# Altium PCB PCB1.PcbDoc
Units mm, origin at the board's own origin, x right, y up, seen from the top; angles counter-clockwise.
Board outline 99.31 x 99.82 mm, 2 copper layers (trên, dưới); 24 components, 29 nets, 133 pads, 4 vias.
Unrouted connection lines stored in the file: 25.
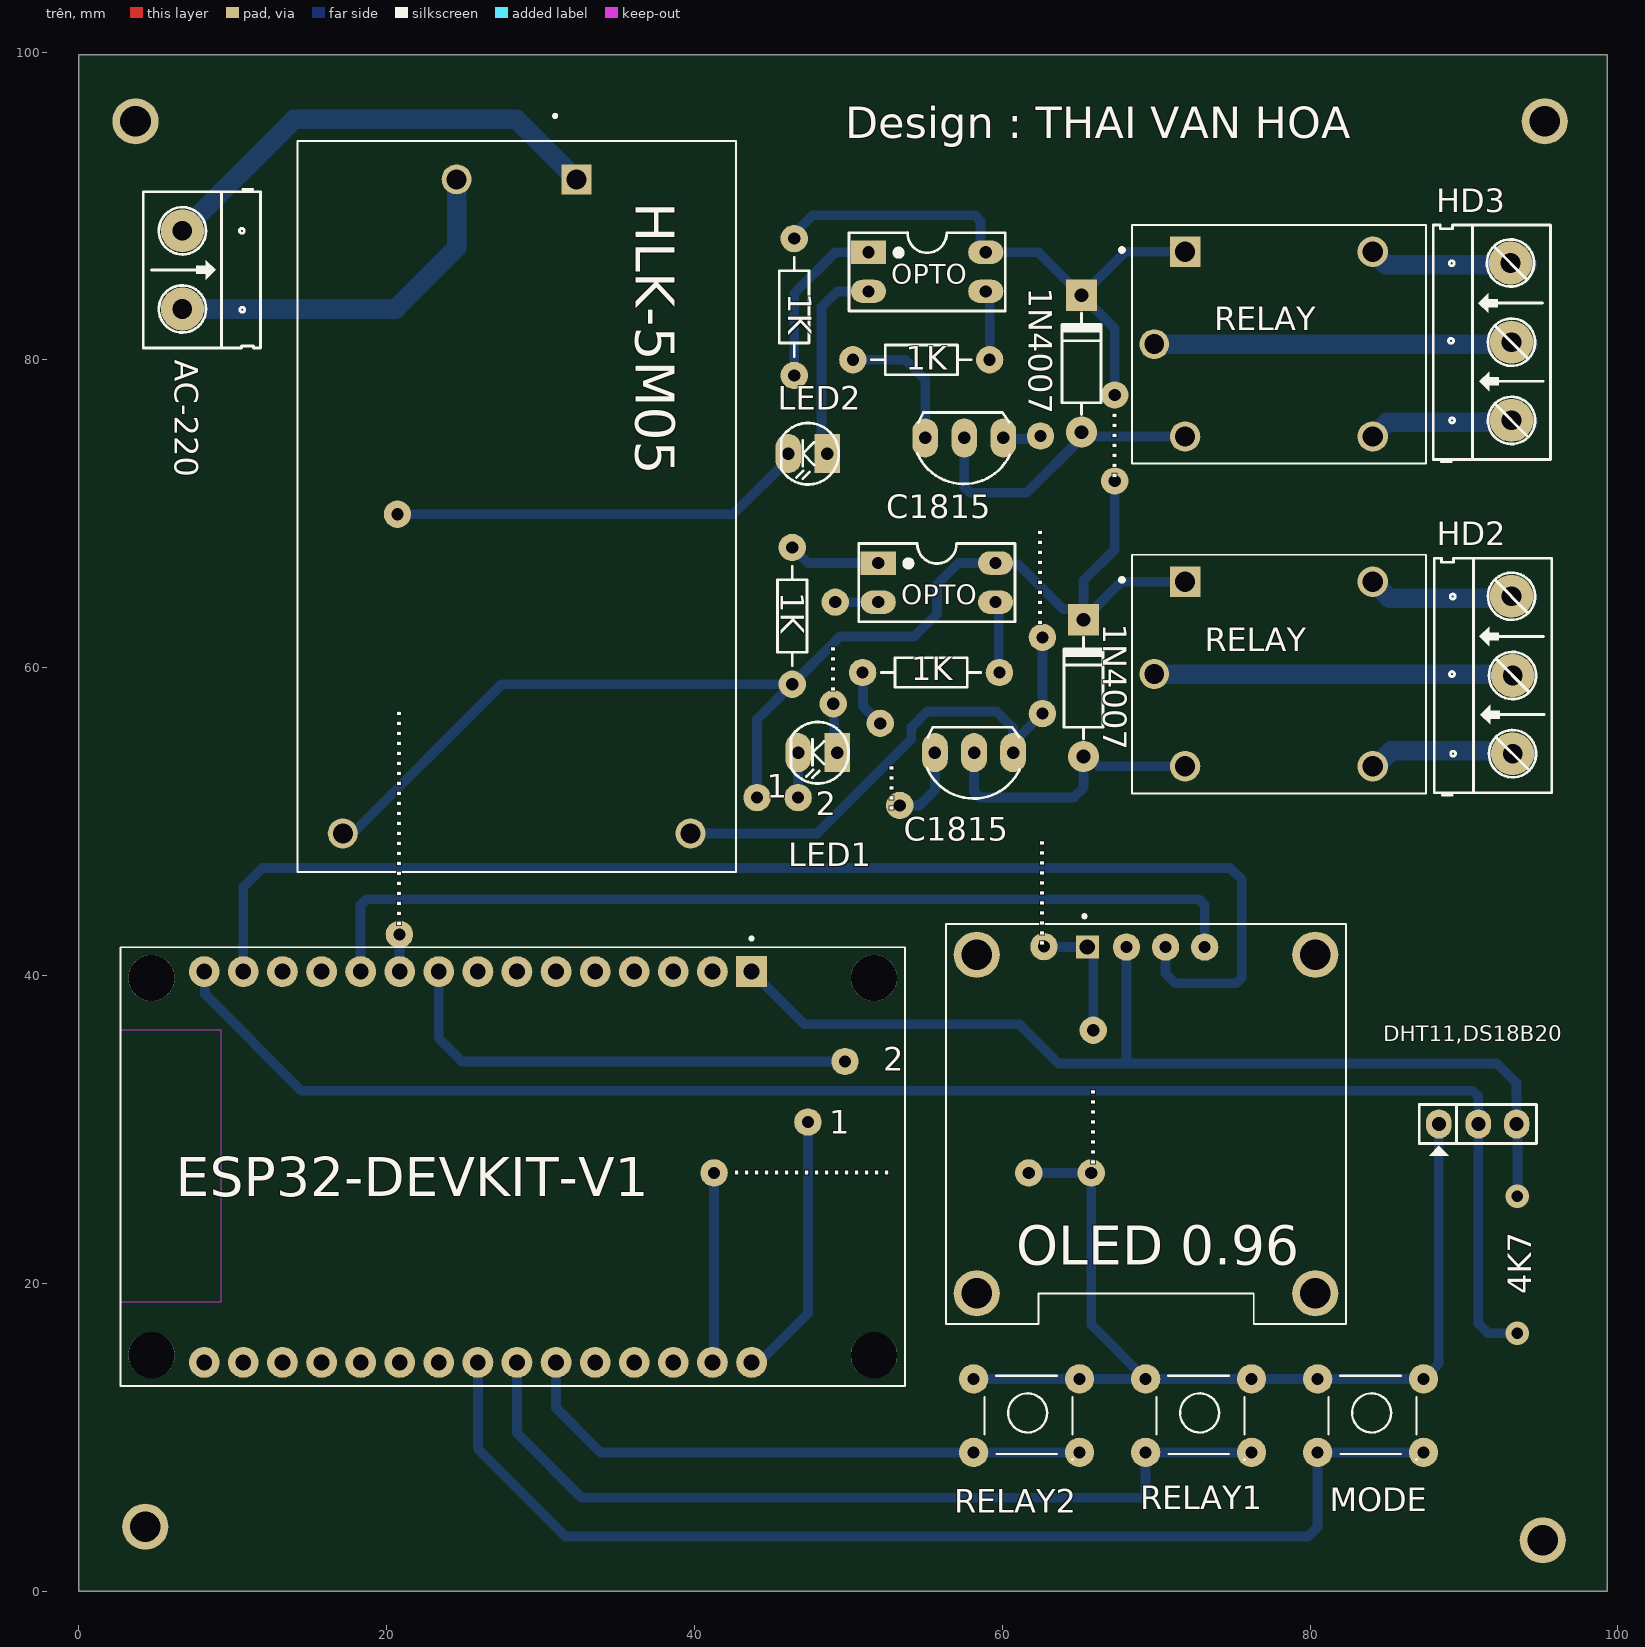
[diagram p0: trên view]
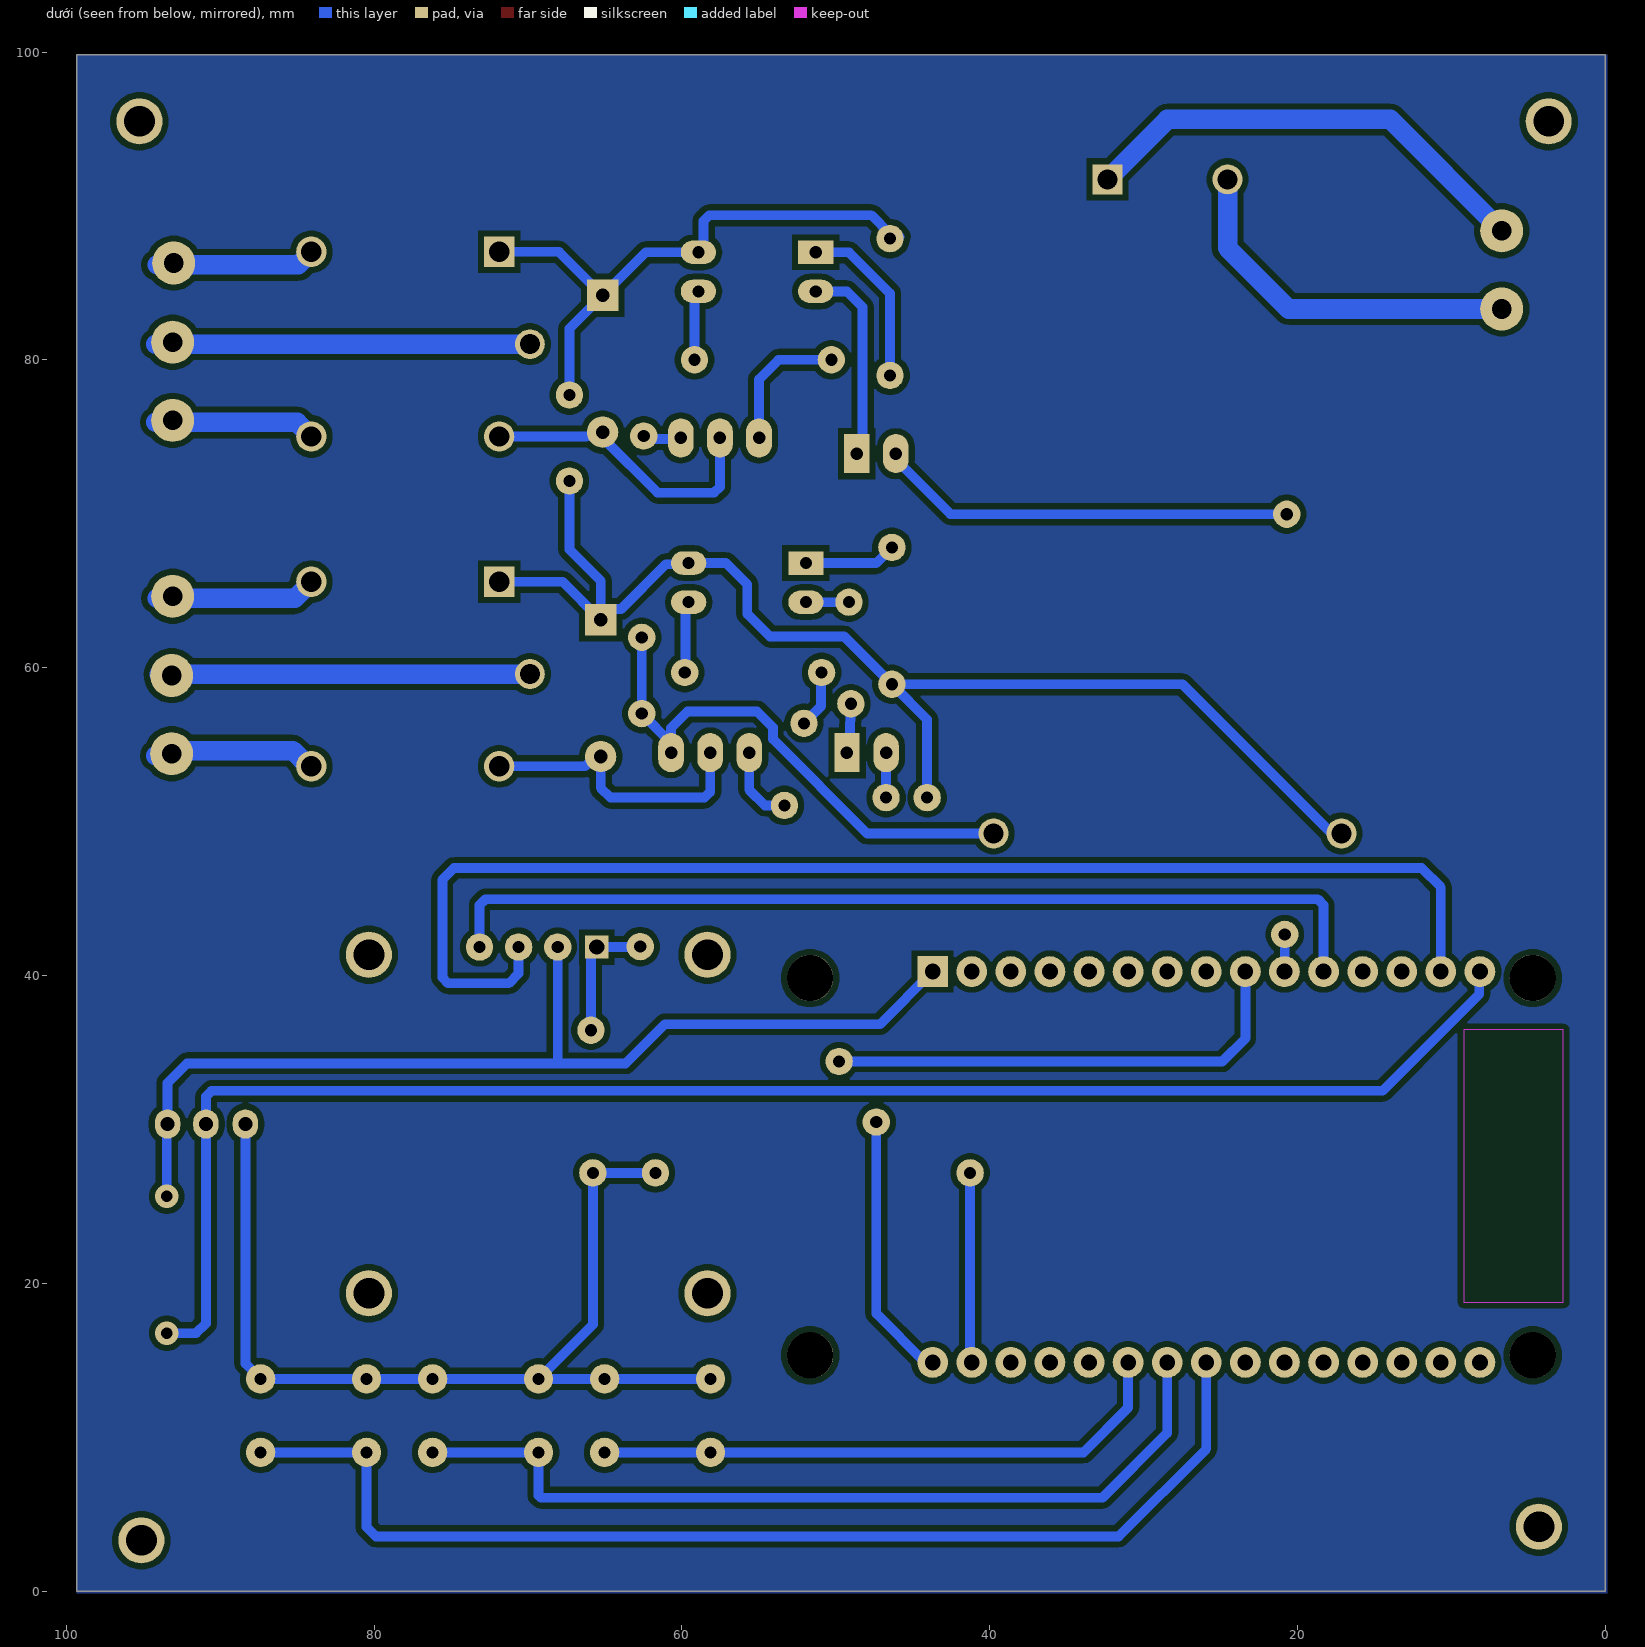
[diagram p1: dưới view, seen from below]
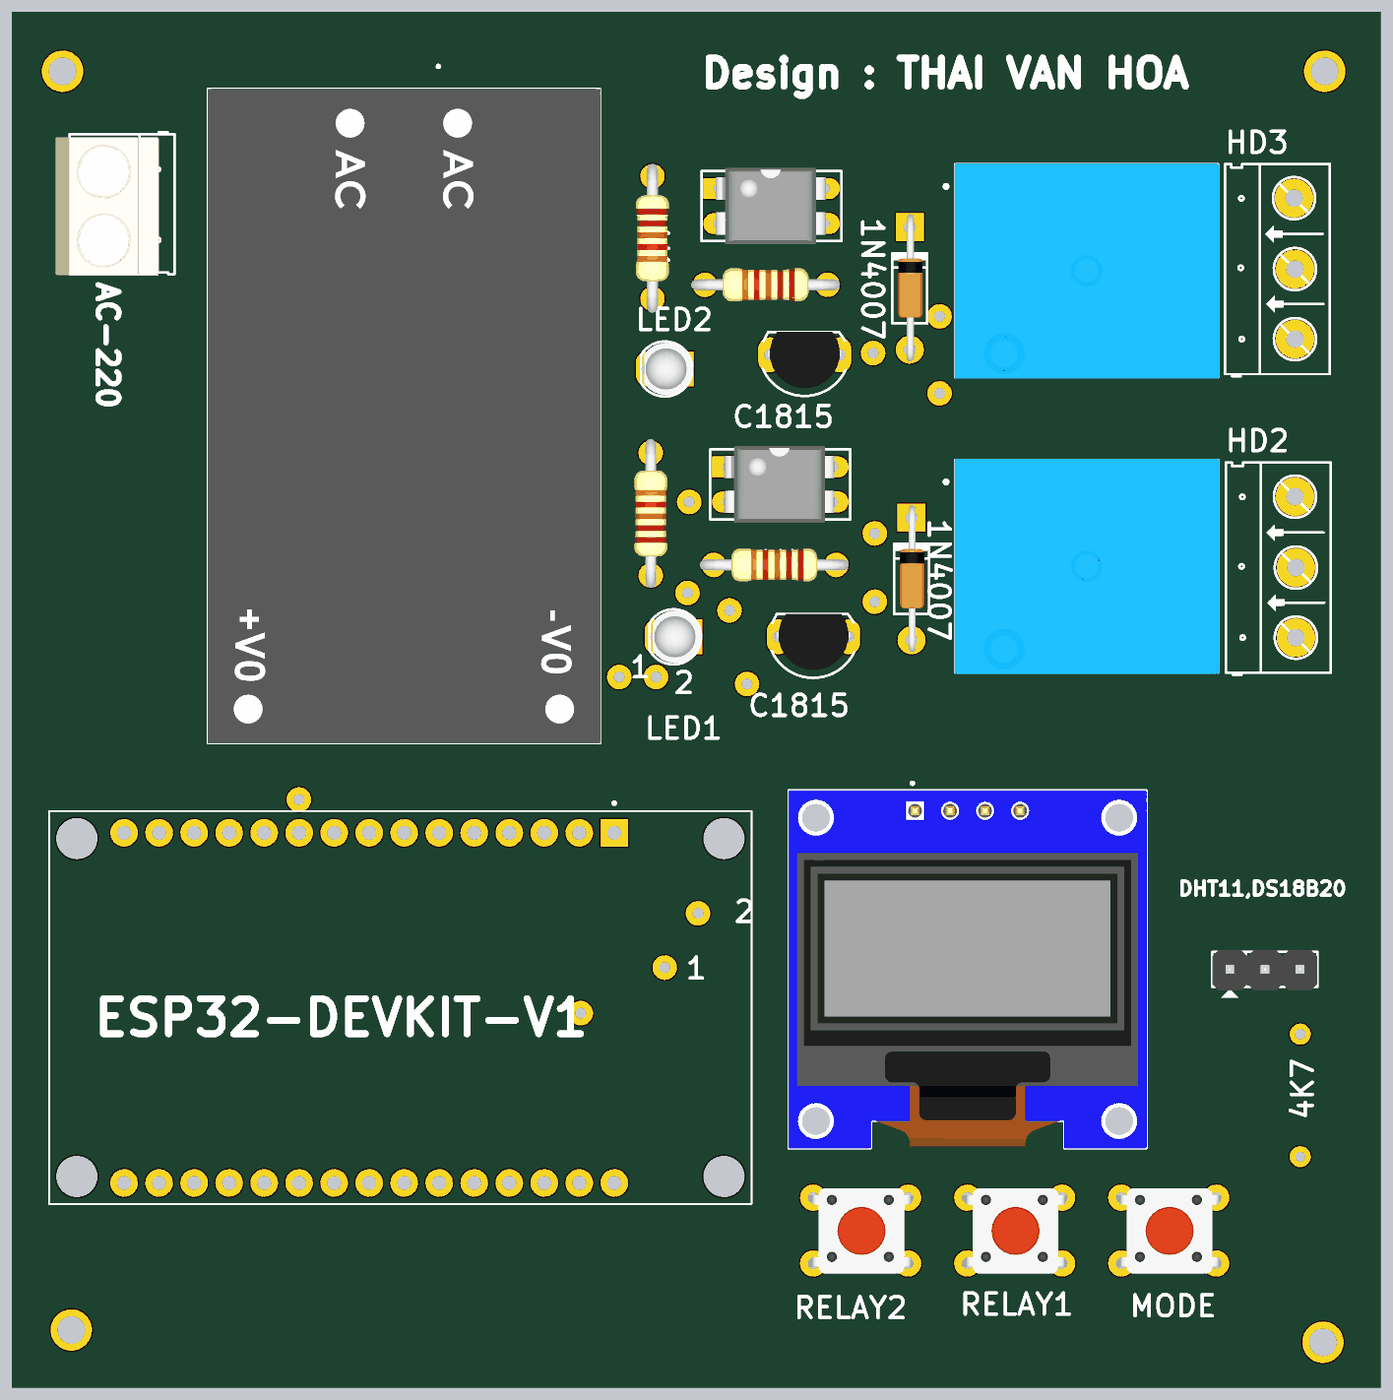
[diagram p2: 3D render of the assembled board from above, using the file's embedded part models]

## Layer stack, top to bottom
Top Solder: solder mask 0.0102, Solder Resist, Dk 3.5
trên: signal copper 0.0356
Dielectric 1: dielectric 0.32, FR-4, Dk 4.8
dưới: signal copper 0.0356
Bottom Solder: solder mask 0.0102, Solder Resist, Dk 3.5

## Board outline
0,0 99.314,0 99.314,99.822 0,99.822

## Design rules (kind name [scope] priority, off if disabled: settings)
Clearance [All] p1: gap=0.381 ignorepadtopadclearanceinfootprint=FALSE
PolygonConnect [All] p1: connectstyle=Relief reliefconductorwidth=0.254 reliefentries=4 polygonreliefangle="90 Angle" airgapwidth=0.254
RoutingVias [All] p1: holewidth=0.711 width=1.27 viastyle="Through Hole" minholewidth=0.711 minwidth=1.27 maxholewidth=0.711 maxwidth=1.27
SolderMaskExpansion [All] p1: expansion=0.102 istentingtop=FALSE
Width [All] p1: maxlimit=1.27 minlimit=0.381 preferedwidth=0.635 checkconnectedcopper=TRUE
30 further rules are at their usual default settings.

## Classes and differential pairs
component class Sheet2: 1K 1N4007 AC-220 C1815 DHT11,DS18B20 ESP32-DEVKIT-V1 HD2 HD3 Hi-Link LED1 LED2 MODE OPTO RELAY RELAY1

## Components (designator, comment, footprint, x,y, rotation, side; value= is the part's Value field where it differs from the comment)
1K "Res1" R1/4W 50.292,80.01 r0 top value=1K (schematic designator R4)
1K "Res1" R1/4W 46.482,78.994 r90 top value=1K (schematic designator R3)
1K "Res1" R1/4W 50.927,59.69 r0 top value=1K (schematic designator R2)
1K "Res1" R1/4W 46.355,67.818 r270 top value=1K (schematic designator R1)
1N4007 "1N4007" D1A 65.151,75.311 r270 top (schematic designator D2)
1N4007 "1N4007" D1A 65.278,54.229 r270 top (schematic designator D1)
AC-220 "Header 2" HED2 6.731,88.392 r270 top (schematic designator HD1)
C1815 "C1815" QTO-92 57.531,74.93 r180 top (schematic designator Q2)
C1815 "C1815" QTO-92 58.166,54.483 r180 top (schematic designator Q1)
DHT11,DS18B20 "Jumper 3" JP3 90.907,30.353 r0 top value=J3 (schematic designator J1)
ESP32-DEVKIT-V1 "ESP32-DEVKIT-V1" MODULE_ESP32_DEVKIT_V1 28.194,27.559 r270 top (schematic designator U2)
HD2 "Header 3" HED3 93.158,54.416 r90 top
HD3 "Header 3" HED3 93.091,76.073 r90 top
HLK-5M05 "HLK-10M05" CONV_HLK-10M05 28.448,70.485 r270 top (schematic designator PS1)
LED1 "LED" LED-3 49.276,54.483 r180 top value="LED 3 ly Single Colour"
LED2 "LED" LED-3 48.641,73.914 r180 top value="LED 3 ly Single Colour"
MODE "BT" SW4 80.823,13.995 r0 top (schematic designator BT1)
"OLED 0.96" "DM-OLED096-636" MODULE_DM-OLED096-636 69.342,30.353 r0 top (schematic designator U1)
OPTO "OPTO PC817" DIP4/W0.3 51.308,86.995 r270 top value=PC817 (schematic designator OPTO2)
OPTO "OPTO PC817" DIP4/W0.3 51.943,66.802 r270 top value=PC817 (schematic designator OPTO1)
RELAY "SRD-05VDC-SL-C" RELAY_SRD-05VDC-SL-C 77.978,81.026 r0 top (schematic designator K2)
RELAY "SRD-05VDC-SL-C" RELAY_SRD-05VDC-SL-C 77.978,59.594 r0 top (schematic designator K1)
RELAY1 "BT" SW4 69.647,13.995 r0 top (schematic designator BT2)
RELAY2 "BT" SW4 58.471,13.995 r0 top (schematic designator BT3)

## Footprints (in the part's own frame and the unit in brackets; to place one, negate y for a bottom-side part, rotate by r counter-clockwise, add the part's x,y. Pads: shape width x height; smd on the part's side, far side on the other; paste and mask are expansions set on the pad)
CONV_HLK-10M05 [mm]
  rect 1.95x1.95 / inner round 1.95 / far side rect 1.95x1.95 hole 1.3: 1(-21.25,3.9)
  round 1.95 hole 1.3: 2(-21.25,-3.9) 3(21.25,11.3) 4(21.25,-11.3)
  silkscreen extent -25.47,-14.25 23.75,14.25, body extent -23.75,-14.25 23.75,14.25, height 22
D1A [mil] "Diode 1A, W 100mil, L 350mil"
  round 80 hole 35: 1(0,0)
  rect 80x80 hole 35: 2(-350,0)
  silkscreen extent -305,-50 -45,50, body extent -386,-33 34,36, height 84
DIP4/W0.3 [mil] "4 PIN, W 300mil, Pin to pin 100mil"
  rect 60x90 hole 31: 1(0,0)
  oval 60x90 hole 31: 2(100,0) 3(100,300) 4(0,300)
  silkscreen extent -50,-50 150,350, body extent -59,-10 159,305, height 170
HED2 [mil] "Header 2, 2 pin, hight 300mil, Pin to Pin 200, Colour Green"
  round 110 hole 50: 1(0,0) 2(200,0)
  silkscreen extent -106,-100 300,200, body extent -92,-140 302,155, height 394
HED3 [mil] "Header 3, 3 pin, hight 300mil, Pin to Pin 200, Colour Green"
  round 110 hole 50: 1(0,0) 2(200,0) 3(402.62,2.62)
  silkscreen extent -106,-100 500,200
JP3 [mil] "Jumper 3"
  oval 65x75 hole 36: 1(-100,0) 2(1,0) 3(99,0)
  silkscreen extent -150,-81 150,50, body extent -150,-60 150,55, height 355
LED-3 [mil] "LED 2 PIN, 3ly Only colour"
  rect 65x100 hole 32: 1(0,0)
  oval 65x100 hole 32: 2(100,0)
  silkscreen extent -29,-78 118,79, body extent -29,-75 109,75, height 256
MODULE_DM-OLED096-636 [mm]
  rect 1.508x1.508 / inner round 1.508 / far side rect 1.508x1.508 hole 1: 1(-3.81,11.5)
  round 1.778 hole 0.787: 2(-1.27,11.5) 3(1.27,11.5) 4(3.81,11.5)
  round 3 hole 2: S1(-11,11) S2(11,11) S3(11,-11) S4(-11,-11)
  silkscreen extent -13,-13 13,13.6, body extent -13,-13 13,13, height 5.66
MODULE_ESP32_DEVKIT_V1 [mm]
  rect 2x2 / inner round 2 / far side rect 2x2 hole 1.02: 1(-12.7,15.515)
  round 2 hole 1.02: 2(-12.7,12.975) 3(-12.7,10.435) 4(-12.7,7.895) 5(-12.7,5.355) 6(-12.7,2.815) 7(-12.7,0.275) 8(-12.7,-2.265) 9(-12.7,-4.805) 10(-12.7,-7.345) 11(-12.7,-9.885) 12(-12.7,-12.425) 13(-12.7,-14.965) 14(-12.7,-17.505) 15(-12.7,-20.045) 16(12.7,-20.045) 17(12.7,-17.505) 18(12.7,-14.965) 19(12.7,-12.425) 20(12.7,-9.885) 21(12.7,-7.345) 22(12.7,-4.805) 23(12.7,-2.265) 24(12.7,0.275) 25(12.7,2.815) 26(12.7,5.355) 27(12.7,7.895) 28(12.7,10.435) 29(12.7,12.975) 30(12.7,15.515)
  round 3 hole 3 unplated: ""(-12.28,23.475) ""(-12.28,-23.475) ""(12.23,23.475) ""(12.23,-23.475)
  Keep-Out Layer region: 8.78,-25.475 -8.91,-25.475 -8.91,-18.985 8.78,-18.985
  Keep-Out Layer region: 8.78,-25.475 -8.91,-25.475 -8.91,-18.985 8.78,-18.985
  silkscreen extent -14.95,-25.47 14.23,25.47
QTO-92 [mil] "TO-92"
  oval 66x100 hole 32: 1(-100,0) 2(0,0) 3(100,0)
  silkscreen extent -117,-65 120,118, body extent -109,-66 109,95, height 245
R1/4W [mil] "R 1/4W, 2 Pin, 350mil"
  round 70 hole 31: 1(0,0) 2(350,0)
  silkscreen extent 48,-38 302,38, body extent -40,-47 386,47, height 111
RELAY_SRD-05VDC-SL-C [mm]
  rect 1.98x1.98 / inner round 1.98 / far side rect 1.98x1.98 hole 1.32: A1(-6.1,6)
  round 1.98 hole 1.32: A2(-6.1,-6) NC(6.1,6) NO(6.1,-6)
  round 1.935 hole 1.29: COM(-8.1,0)
  silkscreen extent -10.3,-7.75 9.55,7.75, body extent -9.6,-7.8 9.6,7.8, height 15.8
SW4 [mil] "SW button 4pin, 250 x250 mil"
  round 75 hole 31: 1(-13,-8) 1(258,-8) 2(-13,-196) 2(258,-196)
  silkscreen extent 15,-215 240,0, body extent -31,-225 281,19, height 276

## Part data
1K 1K 1K 1K: library part Res1_4, "Resistor", Manufacturer="Generic Components", Class=Passive, Published=08/06/2000, Publisher="Altium Hobart Technology Centre", SubClass=Resistor
1N4007 1N4007: library part D1A, "Diode 1A"
AC-220: library part Hed2, "Header 2 (Green)"
C1815 C1815: "NPN 600mW, ECB"
DHT11,DS18B20: library part JP3
ESP32-DEVKIT-V1: "Dual core, Wi-Fi: 2.4 GHz up to 150 Mbits/s,BLE (Bluetooth Low Energy) and legacy Bluetooth, 32 bits, Up to 240 MHz", Package=None, Availability="Not in stock", Check_prices=https://www.snapeda.com/parts/ESP32-DEVKIT-V1/Do+it/view-part/?ref=eda, MF="Do it", MP=ESP32-DEVKIT-V1, Price=None, SnapEDA_Link=https://www.snapeda.com/parts/ESP32-DEVKIT-V1/Do+it/view-part/?ref=snap
HD2 HD3: "Header 3 (Green)"
HLK-5M05: "10W Ultra-Compact Power Module", Package=Package, Check_prices=https://www.snapeda.com/parts/HLK-10M05/Hi-link/view-part/?ref=eda, MF=Hi-link, MP=HLK-10M05, SnapEDA_Link=https://www.snapeda.com/parts/HLK-10M05/Hi-link/view-part/?ref=snap
LED1 LED2: "LED Single colour Green and Red"
MODE RELAY1 RELAY2: library part BUTTON
"OLED 0.96": "0.96â€ 128 X 64 MONOCHROME GRAPHIC OLED DISPLAY MODULE - I2C", Package=Package, Check_prices=https://www.snapeda.com/parts/DM-OLED096-636/Display+Module/view-part/?ref=eda, MF="Display Module", MP=DM-OLED096-636, SnapEDA_Link=https://www.snapeda.com/parts/DM-OLED096-636/Display+Module/view-part/?ref=snap
OPTO OPTO: "Single Opto"
RELAY RELAY: "5V Trigger Relay Module For Arduino And Raspberry Pi 5V Trigger Relay Module For Arduino And Raspberry Pi", Package="NON STANDARD-5 Songle Relay", Availability="Not in stock", Check_prices=https://www.snapeda.com/parts/SRD-05VDC-SL-C/Songle+Relay/view-part/?ref=eda, MF="Songle Relay", MP=SRD-05VDC-SL-C, Price=None, SnapEDA_Link=https://www.snapeda.com/parts/SRD-05VDC-SL-C/Songle+Relay/view-part/?ref=snap

## Free pads (board coordinates)
  round 3 hole 2: 7(3.683,95.504) 7(4.318,4.191) 7(95.123,3.302) 8(95.25,95.504)
  round 1.778 hole 0.787: 9(65.786,27.178) 10(65.913,36.449) 11(62.71,41.882) 12(62.611,61.976) 13(62.484,75.057) 14(62.611,57.023) 15(67.31,72.136) 16(67.31,77.724) 17(52.07,56.388) 18(53.34,51.054) 19(49.149,64.262) 20(49.022,57.658) 21(47.371,30.48) 22(44.069,51.562) 23(46.736,51.562) 24(49.784,34.417) 25(41.275,27.178) 26(61.722,27.178) 27(20.828,42.672) 28(20.701,69.977)

## Via types
v1: diameter 1.524, hole 0.762, trên to dưới, 2 vias
v2: diameter 1.27, hole 0.711, trên to dưới, 2 vias

## Nets (pads, with @x,y where several pads share a name; then routed paths per layer and width w, separated by ;. In a path a pad name is that pad's centre, name@x,y a point inside that pad or via, vN(x,y) a via of type N, cw(c..) or ccw(c..) an arc to the next point about the centre after c; other vN are vias at no path point)
3V3: "OLED 0.96.2" DHT11,DS18B20.3 ESP32-DEVKIT-V1.1 | length 62.7
  dưới w0.635: ESP32-DEVKIT-V1.1 47.138,36.83 61.124,36.83 63.664,34.29 92.151,34.29 93.421,33.02 93.421,30.353 ; 68.072,34.544 68.072,41.853
D18: ESP32-DEVKIT-V1.9 LED1.2
D19: ESP32-DEVKIT-V1.10 LED2.2 pad.27 | length 0.7
  trên w0.635: LED2.2@46.101,73.195 LED2.2
D21: "OLED 0.96.4" ESP32-DEVKIT-V1.11 | length 62.2
  dưới w0.635: ESP32-DEVKIT-V1.11 18.309,44.586 18.681,44.958 72.771,44.958 73.152,44.577 73.152,41.853
D22: "OLED 0.96.3" ESP32-DEVKIT-V1.14 | length 84.6
  dưới w0.635: ESP32-DEVKIT-V1.14 10.689,45.741 11.938,46.99 74.803,46.99 75.565,46.228 75.565,39.869 75.193,39.497 71.247,39.497 70.612,40.132 70.612,41.853
D23: DHT11,DS18B20.2 ESP32-DEVKIT-V1.15 | length 88.8
  dưới w0.635: ESP32-DEVKIT-V1.15 8.186,40.222 8.186,38.804 14.478,32.512 90.56,32.512 90.932,32.14 90.932,30.353
D25: ESP32-DEVKIT-V1.23 MODE.2
D26: ESP32-DEVKIT-V1.24 RELAY1.2
D27: ESP32-DEVKIT-V1.25 RELAY2.2
GND: "OLED 0.96.1" C1815.1 DHT11,DS18B20.1 ESP32-DEVKIT-V1.29 HLK-5M05.3 MODE.1 RELAY1.1 RELAY2.1 | length 27.3
  trên w0.635: C1815.1@60.071,74.78 C1815.1@60.071,74.93 ; C1815.1@60.706,54.483 C1815.1@60.706,54.916
  dưới w0.635: HLK-5M05.3 47.965,49.235 54.089,55.359 54.089,56.121 55.118,57.15 59.639,57.15 60.706,56.083 C1815.1@60.706,54.483
NetD1_1: 1N4007.1@65.278,54.229 C1815.2@58.166,54.483 RELAY.A2@71.878,53.594 | length 19
  dưới w0.635: C1815.2@58.166,54.483 58.166,51.934 58.538,51.562 64.643,51.562 65.278,52.197 65.278,54.229 65.656,54.229 66.291,53.594 RELAY.A2@71.878,53.594
NetD2_1: 1N4007.1@65.151,75.311 C1815.2@57.531,74.93 RELAY.A2@71.878,75.026 | length 19.3
  dưới w0.635: C1815.2@57.531,74.93 57.531,71.746 57.903,71.374 61.595,71.374 1N4007.1@65.164,74.943 ; 1N4007.1@65.151,75.311 65.436,75.026 65.454,75.044 66.204,75.044 66.221,75.026 RELAY.A2@71.878,75.026
NetHD1_1: AC-220.1 HLK-5M05.1 | length 30.2
  dưới w1.27: AC-220.1 13.97,95.631 28.452,95.631 HLK-5M05.1
NetHD1_2: AC-220.2 HLK-5M05.2 | length 23.9
  dưới w1.27: AC-220.2 20.574,83.312 24.548,87.286 HLK-5M05.2
NetHD2_1: HD2.1 RELAY.NO@84.078,53.594 | length 10.6
  dưới w1.27: RELAY.NO@84.078,53.594 84.27,53.594 85.286,54.61 93.441,54.61 93.761,54.289 HD2.1@94.174,54.289
NetHD2_2: HD2.2 RELAY.COM@69.878,59.594 | length 24.4
  dưới w0.635: RELAY.COM@69.878,59.594 RELAY.COM@69.886,59.586 ; HD2.2@93.957,59.586 HD2.2@94.174,59.369
  dưới w1.27: RELAY.COM@69.886,59.586 HD2.2@93.957,59.586
NetHD2_3: HD2.3 RELAY.NC@84.078,65.594 | length 10.5
  dưới w1.27: RELAY.NC@84.078,65.594 85.156,64.516 HD2.3@94.107,64.516
NetHD3_1: HD3.1 RELAY.NO@84.078,75.026 | length 10.5
  dưới w1.27: RELAY.NO@84.078,75.026 84.998,75.946 HD3.1@94.174,75.946
NetHD3_2: HD3.2 RELAY.COM@69.878,81.026 | length 24.3
  dưới w1.27: RELAY.COM@69.878,81.026 HD3.2@94.174,81.026
NetHD3_3: HD3.3 RELAY.NC@84.078,87.026 | length 10.4
  dưới w1.27: RELAY.NC@84.078,87.026 84.931,86.173 HD3.3@94.107,86.173
NetLED1_1: LED1.1 OPTO.2@51.943,64.262
NetLED2_1: LED2.1 OPTO.2@51.308,84.455 | length 13.2
  dưới w0.635: LED2.1 48.26,74.295 48.26,83.439 49.276,84.455 OPTO.2@51.308,84.455
NetOPTO1_1: 1K.1@46.355,67.818 OPTO.1@51.943,66.802 | length 6
  dưới w0.635: 1K.1@46.355,67.818 47.371,66.802 OPTO.1@51.943,66.802
NetOPTO1_3: 1K.2@59.817,59.69 OPTO.3@59.563,64.262 | length 4.7
  trên w0.635: OPTO.3@59.563,64.262 OPTO.3@59.769,64.056 ; 1K.2@59.769,59.738 1K.2@59.817,59.69
  dưới w0.635: 1K.2@59.769,59.738 OPTO.3@59.769,64.056
NetOPTO2_1: 1K.1@46.482,78.994 OPTO.1@51.308,86.995 | length 11.3
  dưới w0.635: 1K.1@46.482,78.994 46.482,84.328 49.149,86.995 OPTO.1@51.308,86.995
NetOPTO2_3: 1K.2@59.182,80.01 OPTO.3@58.928,84.455 | length 4.7
  trên w0.635: OPTO.3@58.928,84.455 OPTO.3@59.182,84.455
  dưới w0.635: 1K.2@59.182,80.01 OPTO.3@59.182,84.455
NetQ1_3: 1K.1@50.927,59.69 C1815.3@55.626,54.483 | length 0
  trên w0.635: 1K.1@50.927,59.69 1K.1@50.959,59.658
NetQ2_3: 1K.1@50.292,80.01 C1815.3@54.991,74.93 | length 9
  dưới w0.635: 1K.1@50.292,80.01 53.721,80.01 54.991,78.74 C1815.3@54.991,74.93
VCC: 1K.2@46.355,58.928 1K.2@46.482,87.884 1N4007.2 ESP32-DEVKIT-V1.30 HLK-5M05.4 OPTO.4 pad.15 pad.21 RELAY.A1 | length 96.1
  dưới w0.635: HLK-5M05.4@17.746,49.194 27.48,58.928 46.355,58.928 49.454,62.027 54.28,62.027 55.753,63.5 55.753,65.405 57.15,66.802 59.563,66.802 59.632,66.733 61.029,66.733 63.944,63.817 64.579,63.817 65.278,63.119 67.753,65.594 RELAY.A1@71.878,65.594 ; 1K.2@45.847,88.011 1K.2@46.3,88.011 ; 1K.2@46.482,87.884 46.482,88.193 47.697,89.408 58.223,89.408 58.595,89.036 58.595,87.328 58.928,86.995 62.357,86.995 65.151,84.201 67.976,87.026 RELAY.A1@71.878,87.026
pads on no net: "OLED 0.96.S1" "OLED 0.96.S2" "OLED 0.96.S3" "OLED 0.96.S4" ESP32-DEVKIT-V1. ESP32-DEVKIT-V1.2 ESP32-DEVKIT-V1.3 ESP32-DEVKIT-V1.4 ESP32-DEVKIT-V1.5 ESP32-DEVKIT-V1.6 ESP32-DEVKIT-V1.7 ESP32-DEVKIT-V1.8 ESP32-DEVKIT-V1.12 ESP32-DEVKIT-V1.13 ESP32-DEVKIT-V1.16 ESP32-DEVKIT-V1.17 ESP32-DEVKIT-V1.18 ESP32-DEVKIT-V1.19 ESP32-DEVKIT-V1.20 ESP32-DEVKIT-V1.21 ESP32-DEVKIT-V1.22 ESP32-DEVKIT-V1.26 ESP32-DEVKIT-V1.27 ESP32-DEVKIT-V1.28
copper on no net: | length 408.3
  trên w0.254: 41.169,14.859 41.169,15.134 41.275,15.24 ; 43.709,14.859 44.196,14.859 ; 46.355,58.547 46.355,58.928 ; 47.117,30.353 47.244,30.353 47.371,30.226
  dưới w0.254: 69.168,6.071 69.317,6.219
  dưới w0.635: 20.701,69.977 42.545,69.977 46.291,73.724 ; 20.828,40.28 20.828,42.926 ; 23.389,40.259 23.389,35.92 24.892,34.417 49.784,34.417 ; 25.929,14.859 25.929,9.25 31.623,3.556 79.883,3.556 80.493,4.166 80.493,9.017 87.376,9.017 ; 28.469,14.859 28.469,10.266 32.664,6.071 69.168,6.071 ; 31.009,14.859 31.009,11.917 33.909,9.017 58.141,9.017 65.024,9.017 ; 41.275,15.24 41.275,27.178 ; 44.069,51.562 44.069,56.642 46.355,58.928 ; 44.196,14.859 47.371,18.034 47.371,30.226 ; 46.736,51.562 46.736,54.483 ; 49.022,57.658 49.149,54.61 ; 49.149,64.262 51.943,64.262 ; 50.959,59.658 50.959,57.499 52.07,56.388 ; 53.34,51.054 54.61,51.054 55.626,52.07 55.626,54.483 ; 58.141,13.792 65.024,13.792 76.2,13.792 87.376,13.792 88.367,14.783 88.367,30.353 ; 60.071,74.855 62.282,74.855 ; 60.706,55.118 62.611,57.023 62.611,61.976 ; 61.722,27.178 65.786,27.178 65.786,17.323 69.317,13.792 ; 62.71,41.882 62.427,41.853 65.532,41.853 ; 65.151,84.201 67.31,82.042 67.31,77.724 ; 65.278,63.119 65.278,65.659 67.31,67.691 67.31,72.136 ; 65.913,36.449 65.913,41.853 ; 69.317,6.219 69.317,9.017 76.2,9.017 ; 90.932,30.353 90.932,17.399 91.567,16.764 v2(93.472,16.764) ; v1(93.472,25.654) 93.472,30.302
  other v1: 93.472,16.764
  other v2: 93.472,16.764

## Polygon pours and split planes (outlines as drawn)
no net on dưới "NONET_L-01_P-001" (solid, pour order 0): -0.127,99.822 -0.127,-0.127 99.314,-0.127 99.314,99.822

## Silkscreen, mask and mechanical layers (free items; w line width, h text height)
Top Overlay:
  text "Design : THAI VAN HOA" at 49.784,94.403 h2.03
  text "......." at 67.437,72.136 h1.52 r90
  text ".........." at 62.611,62.611 h1.52 r90
  text "....." at 49.149,58.293 h1.52 r90
  text "1" at 44.704,51.562 h1.52
  text "....." at 52.959,50.546 h1.52 r90
  text "2" at 47.879,50.419 h1.52
  text "......................" at 20.955,43.053 h1.52 r90
  text "..........." at 62.738,41.783 h1.52 r90
  text "2" at 52.258,33.825 h1.52
  text "1" at 48.768,29.718 h1.52
  text "........" at 66.04,27.559 h1.52 r90
  text "................" at 42.418,27.051 h1.52
  text "4K7" at 94.361,19.304 h1.52 r90